# Altium PCB Czujnik światłowodowy PCB.PcbDoc
Units mm, origin at the board's own origin, x right, y up, seen from the top; angles counter-clockwise.
Board outline 80.26 x 52.25 mm, 2 copper layers (Top Layer, Bottom Layer); 30 components, 20 nets, 86 pads, 275 vias.
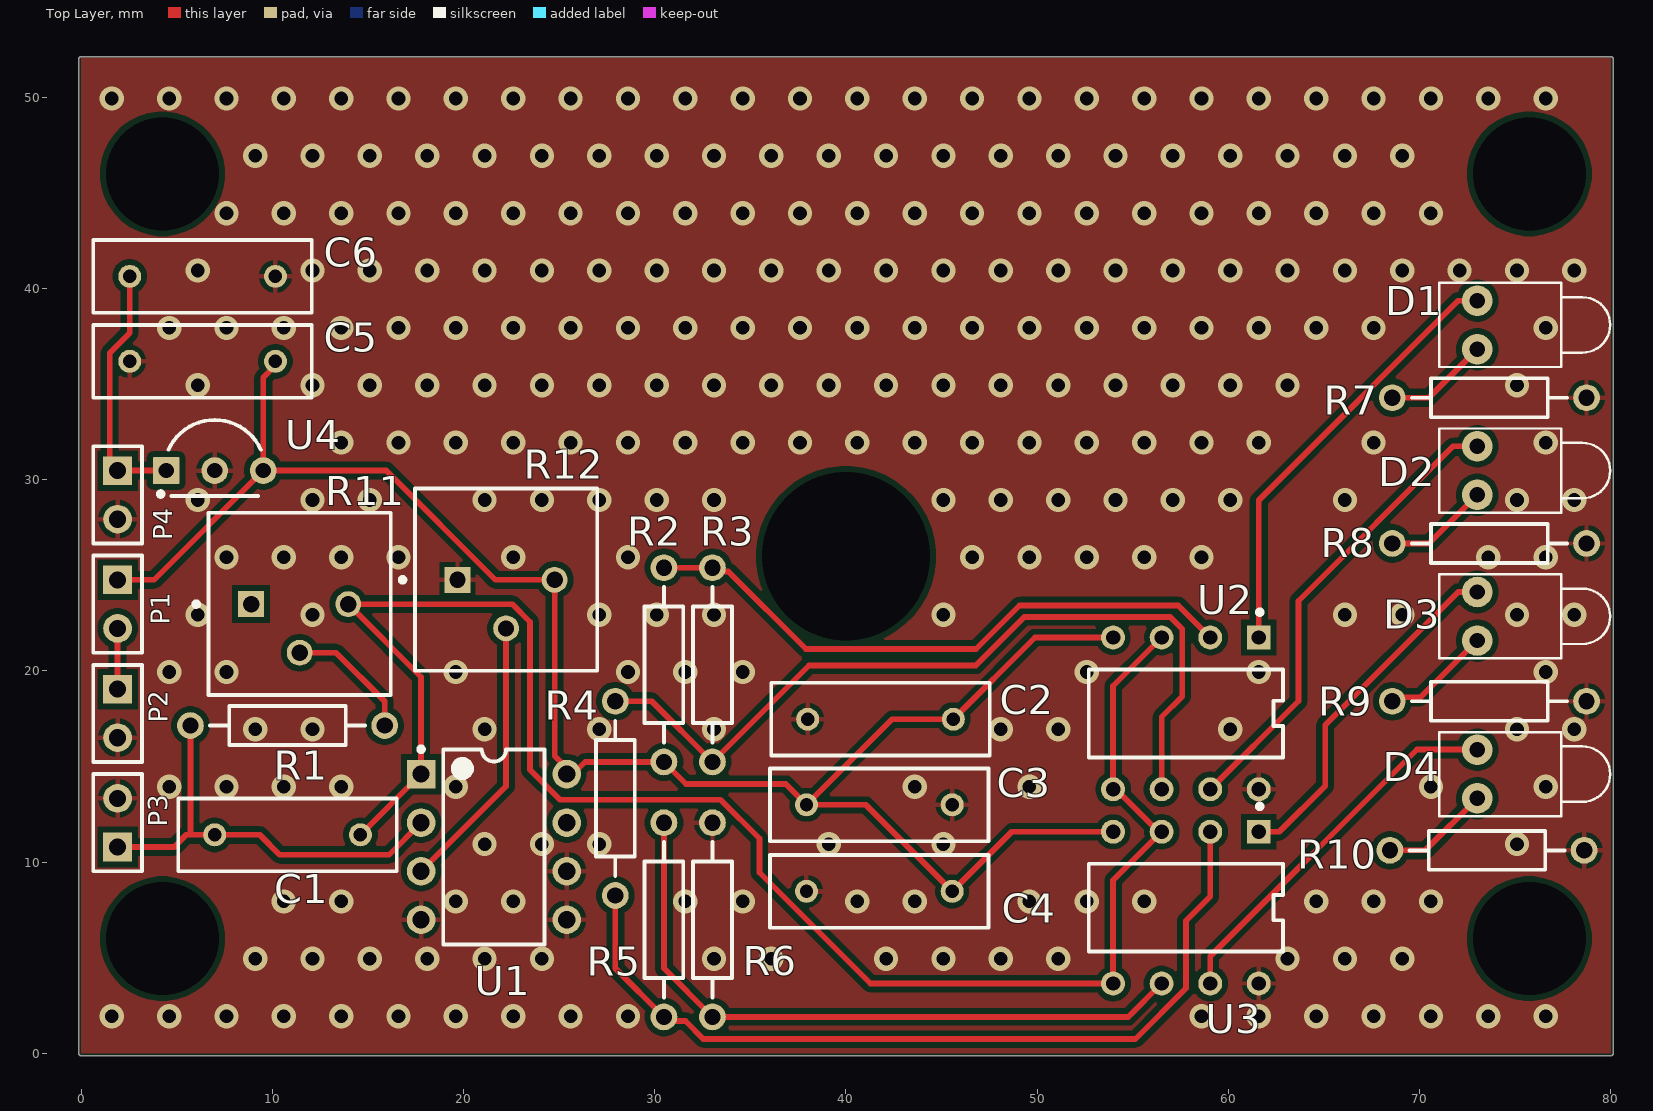
[diagram p0: Top Layer view]
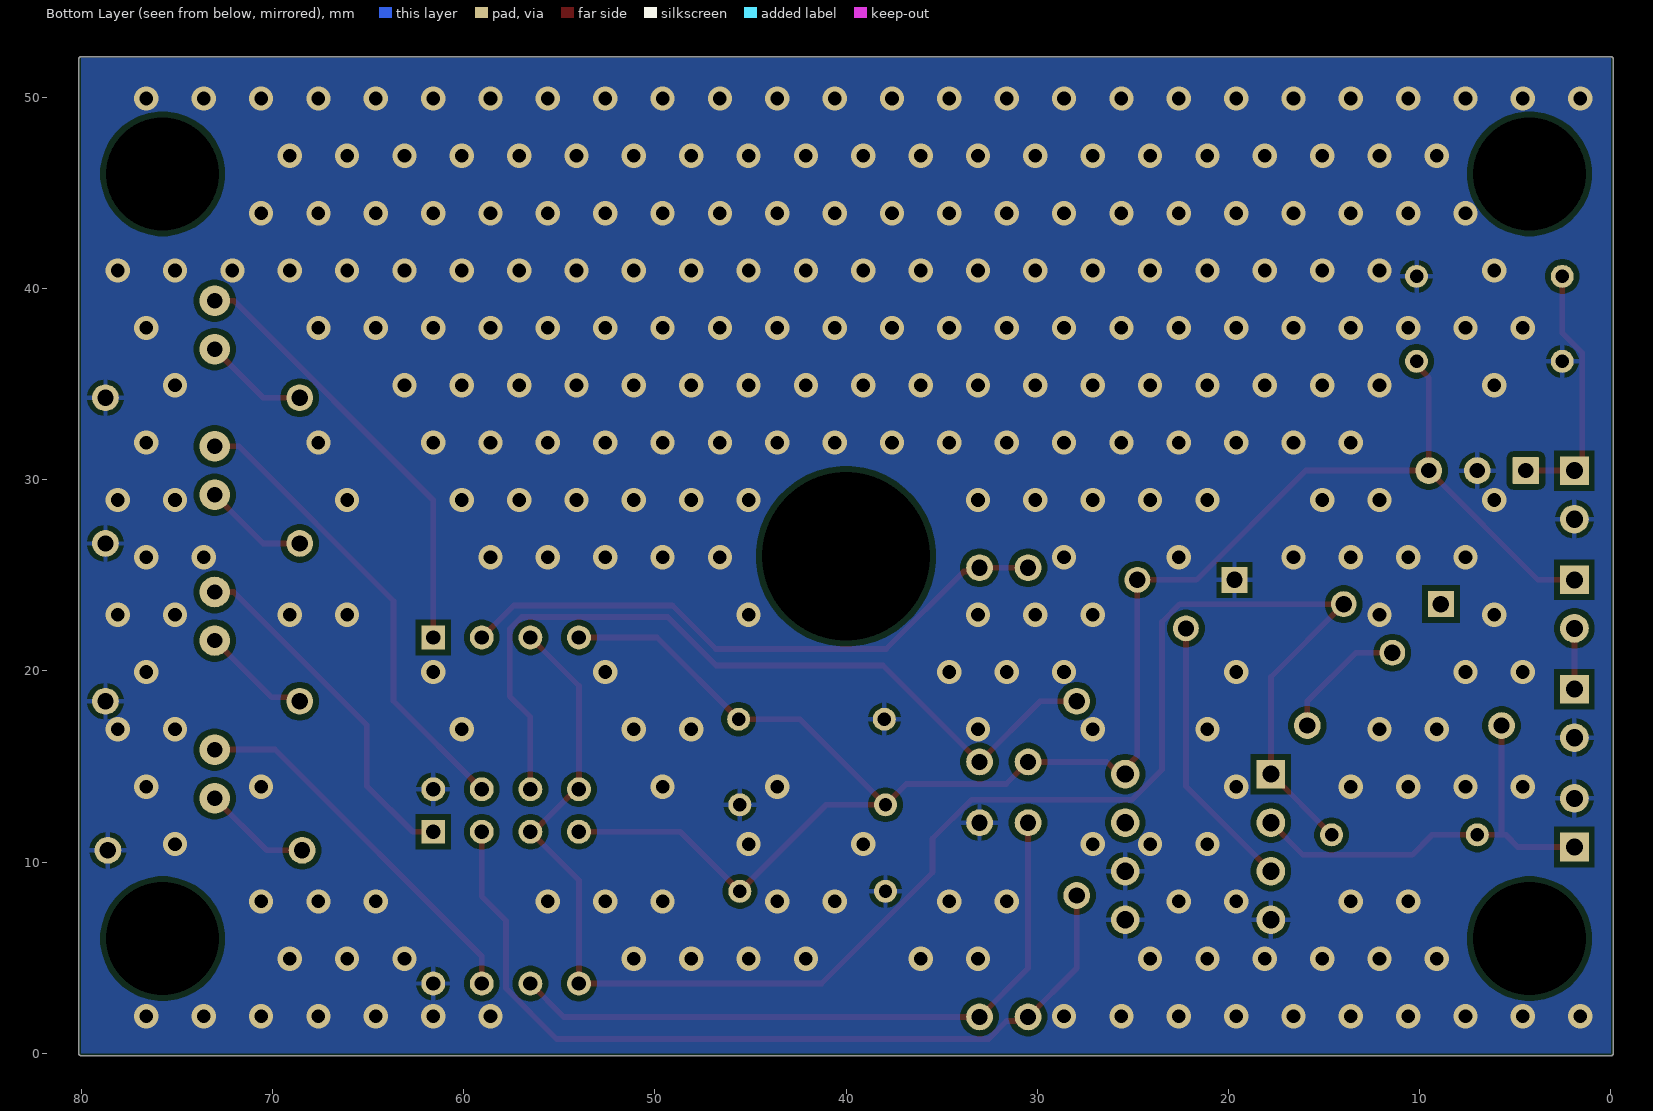
[diagram p1: Bottom Layer view, seen from below]

## Layer stack, top to bottom
Top Solder: solder mask 0.0102, Solder Resist, Dk 3.5
Top Layer: signal copper 0.0356
Dielectric 1: dielectric 0.32, FR-4, Dk 4.8
Bottom Layer: signal copper 0.0356
Bottom Solder: solder mask 0.0102, Solder Resist, Dk 3.5

## Board outline
0,-0.127 cw(c0,0) -0.127,0 -0.127,52 cw(c0,52) 0,52.127 80.01,52.127 cw(c80.01,52) 80.137,52 80.137,0 cw(c80.01,0) 80.005,-0.127

## Design rules (kind name [scope] priority, off if disabled: settings)
Clearance "Stitching GND" [IsStitchingVia and InNet('GND') vs (IsVia and (Not IsStitchingVia)) Or IsPad] p1: gap=0.127 ignorepadtopadclearanceinfootprint=FALSE
Clearance [All] p2: gap=0.3 ignorepadtopadclearanceinfootprint=FALSE except(0: Arc-Hole Track-Hole SMDPad-Hole THPad-Hole Via-Hole Fill-Hole Poly-Hole Region-Hole Text-Hole)
PolygonConnect [All] p1: connectstyle=Relief reliefconductorwidth=0.254 reliefentries=4 polygonreliefangle="90 Angle" airgapwidth=0.254
RoutingVias [All] p1: holewidth=0.711 width=1.27 viastyle="Through Hole" minholewidth=0.711 minwidth=1.27 maxholewidth=0.711 maxwidth=1.27
SolderMaskExpansion [All] p1: expansion=0.102 istentingtop=FALSE
Width [All] p1: maxlimit=0.3 minlimit=0.254 preferedwidth=0.3 minimp=50.000000 maximp=50.000000 favimp=50.000000
30 further rules are at their usual default settings.

## Classes and differential pairs
component class 105_Bańkowski: C1 C2 C3 C5 C6 D1 D2 D3 D4 P1 P2 P3 q R1 R2 R3 R4 R5 R6 R7 R8 R9 R10 R11 R12 U1 U3 U4

## Components (designator, comment, footprint, x,y, rotation, side; value= is the part's Value field where it differs from the comment)
C1 "Cap" RAD-0.3 10.795,11.43 r0 top value=100pF
C2 "Cap" RAD-0.3 41.81,17.475 r180 top value=100nF
C3 "Cap" RAD-0.3 41.75,13 r0 top value=100nF
C4 "Cap" RAD-0.3 41.75,8.475 r180 top value=100nF
C5 "Cap" RAD-0.3 6.35,36.195 r180 top value=470nF
C6 "Cap" RAD-0.3 6.35,40.64 r0 top value=100nF
D1 "LED_RED" LED-1 73.025,38.1 r0 top
D2 "LED_RED" LED-1 73.025,30.48 r0 top
D3 "LED_RED" LED-1 73.025,22.86 r0 top
D4 "LED_RED" LED-1 73.025,14.605 r0 top
P1 "BATTERY" HDR1X2 1.905,24.765 r270 top
P2 "SWITCH" HDR1X2 1.905,19.05 r270 top
P3 "D_SENSOR" HDR1X2 1.905,10.795 r90 top
P4 "D_LASER" HDR1X2 1.905,30.48 r270 top
R1 "Res2" AXIAL-0.4 10.795,17.145 r0 top value=1K
R2 "Res2" AXIAL-0.4 30.48,20.32 r270 top value=10K
R3 "Res2" AXIAL-0.4 33.02,20.32 r90 top value=10K
R4 "Res2" AXIAL-0.4 27.94,13.335 r90 top value=10K
R5 "Res2" AXIAL-0.4 30.48,6.985 r270 top value=10K
R6 "Res2" AXIAL-0.4 33.02,6.985 r270 top value=10K
R7 "Res2" AXIAL-0.4 73.66,34.29 r0 top value=470R
R8 "Res2" AXIAL-0.4 73.66,26.67 r0 top value=470R
R9 "Res2" AXIAL-0.4 73.66,18.415 r0 top value=470R
R10 "Res2" AXIAL-0.4 73.533,10.617 r0 top value=470R
R11 "100K" BOUR-3386P 11.43,22.225 r0 top
R12 "10K" BOUR-3386P 22.225,23.495 r0 top
U1 "TL032IP" P0008A 21.59,10.795 r0 top
U2 "LM393AP" FP-P0008A-MFG 57.785,17.78 r270 top
U3 "LM393AP" FP-P0008A-MFG 57.785,7.62 r270 top
U4 "LM78L05ACZ/NOPB" LP0003A 6.985,30.48 r90 top

## Footprints (in the part's own frame and the unit in brackets; to place one, negate y for a bottom-side part, rotate by r counter-clockwise, add the part's x,y. Pads: shape width x height; smd on the part's side, far side on the other; paste and mask are expansions set on the pad)
AXIAL-0.4 [mm] "Axial Device, Thru-Hole; 2 Leads; 0.4 in Pin Spacing"
  round 1.4 hole 0.85: 1(-5.08,0) 2(5.08,0)
  silkscreen extent -4.06,-1.02 4.06,1.02
BOUR-3386P [mm] "THD, 3-Leads, Body 9.53x9.53mm, Pitch 2.54mm"
  rect 1.35x1.35 hole 0.85: 1(-2.54,1.27)
  round 1.35 hole 0.85: 2(0,-1.27) 3(2.54,1.27)
  silkscreen extent -5.54,-3.48 4.76,6.05, body extent -4.79,-3.52 4.79,6.06, height 4.95
FP-P0008A-MFG [mm]
  rect 1.25x1.25 hole 0.75 paste-1000 mask+0: 1(-3.97,3.81)
  round 1.25 hole 0.75 paste-1000 mask+0: 2(-3.97,1.27) 3(-3.97,-1.27) 4(-3.97,-3.81) 5(3.97,-3.81) 6(3.97,-1.27) 7(3.97,1.27) 8(3.97,3.81)
  silkscreen extent -5.42,-5.08 2.3,5.08, body extent -4.69,-5.18 4.69,5.18, height 0.25
HDR1X2 [mm] "Connector; Header; 2 Position"
  rect 1.5x1.5 hole 0.9: 1(0,0)
  round 1.5 hole 0.9: 2(2.54,0)
  silkscreen extent -1.27,-1.27 3.81,1.27
LED-1 [mm] "LED; 2 Leads"
  round 1.6 hole 0.8: 1(0,1.27) 2(0,-1.27)
  silkscreen extent -2,-2.2 6.95,2.2
LP0003A [mm] "TO, Flat Index; 3 In-Line, Formed Axial Leads; Body Dia. 4.8mm; Leads 0.56 x 0.41 mm (max)"
  rrect7% 1.4x1.4 hole 0.8: 1(0,2.54)
  round 1.4 hole 0.8: 2(0,0) 3(0,-2.54)
  silkscreen extent -1.35,-2.41 2.65,2.95, body extent -1.33,-2.83 2.35,2.83, height 9.01
P0008A [mm] "DIP, 8-Leads, Body 10.15x6.6mm, Pitch 2.54mm"
  rect 1.5x1.5 hole 0.9: 1(-3.81,3.81)
  round 1.5 hole 0.9: 2(-3.81,1.27) 3(-3.81,-1.27) 4(-3.81,-3.81) 5(3.81,-3.81) 6(3.81,-1.27) 7(3.81,1.27) 8(3.81,3.81)
  silkscreen extent -3.93,-5.1 2.65,5.23, body extent -3.95,-5.07 3.95,5.07, height 5.08
RAD-0.3 [mm] "Radial Cap, Thru-Hole; 2 Leads; 0.3 in Pin Spacing"
  round 1.2 hole 0.7: 1(-3.81,0) 2(3.81,0)
  silkscreen extent -5.71,-1.91 5.71,1.91

## Part data
C1 C2 C3 C4 C5 C6: "Capacitor", LatestRevisionDate=17-Jul-2002, LatestRevisionNote="Re-released for DXP Platform.", PackageDescription="Radial Cap, Thru-Hole; 2 Leads; 0.3 in Pin Spacing", PackageReference=RAD-0.3, Published=8-Jun-2000, Publisher="Altium Limited"
D1 D2 D3 D4: library part LED1, "Typical RED GaAs LED", LatestRevisionDate=08-Jul-2005, LatestRevisionNote="Mech Layer 1 removed.", PackageDescription="LED; 2 Leads", PackageReference=LED-1, Published=8-Jun-2000, Publisher="Altium Limited"
P1 P2 P3 P4: library part "Header 2", "Header, 2-Pin", LatestRevisionDate=17-Jul-2002, LatestRevisionNote="Re-released for DXP Platform.", Publisher="Altium Limited"
R1 R2 R3 R4 R5 R6 R7 R8 R9 R10: "Resistor", LatestRevisionDate=17-Jul-2002, LatestRevisionNote="Re-released for DXP Platform.", PackageDescription="Axial Device, Thru-Hole; 2 Leads; 0.4 in Pin Spacing", PackageReference=AXIAL-0.4, Published=8-Jun-2000, Publisher="Altium Limited"
R11 R12: library part CMP-2000-05592-1, "Square Trimpot(R) Trimming Potentiometer, 100 KOhm, +/- 10%, 0.5 W, -55 to 125 degC, 3-Pin THD, RoHS, Tube", Manufacturer=Bourns, Manufacturer Series=3386, Maximum Operating Temperature=125C, Minimum Operating Temperature=-55C, Operating Temperature-Max (Cel)=125, Operating Temperature-Min (Cel)=-55, Package=RectangularPackage, Package Description="3-Pin Through Hole Device, Body 9.53 x 9.53 mm, Pitch 2.54 mm", Package Reference=3386P, Power Rating=1/2W, Rated Power Dissipation (P) (W)=0.5, Rated Temperature (Cel)=85, Resistance (ohm)=100000, Resistance Law=Linear, Resistance Value=100KOhm, Resistive Element Material=Cermet, Temperature Coefficient=100ppm/C, Tolerance=10%, Tolerance (%)=10, Actuator Orientation=Vertical, Actuator Type=Screw, Datasheet URL=http://www.bourns.com/docs/Product-Datasheets/3386.pdf, Datasheet Version=05/2016, Family=3386, Lead Free=NO, Manufacturer URL=http://www.bourns.com/, Mounting=ThroughHole, Mounting Feature=ThroughHole, Mounting Technology=ThroughHole, Number of Terminals=3, Number of Turns=1, Packaging=Tube, Product Depth=9.53mm, Product Height=4.83mm, Product Length=9.53mm, Product Type=Potentiometer, Shaft Diameter=3.15mm, Technology=Cermet, Terminal Finish=TINLEAD, Terminal Shape=WIRE, Termination Style=Pin, Type=Trimmer
U1: library part CMP-0017-01026-2, "Dual Enhanced JFET Low-Power Precision Operational Amplifier, 10 to 30 V, -40 to 85 degC, 8-pin DIP (P8), Pb-Free (RoHS)", Manufacturer="Texas Instruments", Rating=Military, Total Supply Voltage(Max)(+5V is 5, +/-5V is 10)=30, Total Supply Voltage(Min)(+5V is 5, +/-5V is 10)=10, CMRR(Min)(dB)=70, Code_JEDEC=MS-001, ComponentLink1Description="Manufacturer URL", ComponentLink1URL=http://www.ti.com/, ComponentLink2Description=Datasheet, ComponentLink2URL=http://www.ti.com/lit/ds/symlink/tl032.pdf, ComponentLink3Description="Package Specification", ComponentLink3URL=http://www.ti.com/litv/pdf/mpdi001b, DatasheetVersion=SLOS180C, Eco-Plan="Pb-Free (RoHS)", GBW(Typ)(MHz)=1.1, IIB(Max)(pA)=200, Iq per channel(Max)(mA)=0.28, Mounting Technology="Through Hole", Number of Channels=2, Offset Drift(Typ)(uV/C)=10.8, PackageDescription="8-Pin Plastic In-Line, Body 9.59 x 6.35 mm, Pitch 2.54 mm", PackageReference=P0008A, PackageVersion="4040082/E, 04/2010", PartNumber=TL032IP, Slew Rate(Typ)(V/us)=5.1, Sub Family="General Purpose Amplifier, High Supply Voltage Amplifier (>=30V), Low Power Amp (<=500uA)", Vio (25C)(Max)(mV)=1.5, Vn at 1kHz(Typ)(nV/rtHz)=41
U2 U3: library part CMP-04896-000062-1, "IC DUAL DIFF COMPARATOR 8-DIP", Case/Package=PDIP, Input Bias Current=250nA, Input Offset Voltage (Vos)=2mV, Max Dual Supply Voltage=18V, Max Operating Temperature=70°C, Max Supply Current=500uA, Max Supply Voltage=30V, Min Dual Supply Voltage=1V, Min Operating Temperature=0°C, Min Supply Voltage=2V, Nominal Supply Current=1mA, Output Current=20mA, Output Current per Channel=6mA, Package Quantity=50, Quiescent Current=2.5mA, Voltage Gain=106.02dB, Contact Plating=Gold, Lead Free="Lead Free", Max Input Current=250nA, Mount="Through Hole", Number of Channels=2, Number of Elements=2, Number of Pins=8, Output Type=TTL, Packaging=Rail/Tube, Radiation Hardening=No, REACH SVHC="No SVHC", Response Time=0.3us, RoHS Compliant=Yes, Type="General Purpose", Weight=0.015535oz
U4: library part CMP-0062-00040-4, "3-Terminal Positive Regulator, 5 Vout, 3-pin TO-92, Pb-Free", Manufacturer="Texas Instruments", PackageTopMarking=NSXYTT*LM78L*05ACZ, PowerWise=N, Code_JEDEC=TO-226-AA, ComponentLink1Description="Datasheet URL", ComponentLink1URL=http://www.ti.com/general/docs/lit/getliterature.tsp?genericPartNumber=LM78L05&fileType=pdf, CompType="LDO IC", High-Reliability=Y, PackageDescription="TO-92, Molded, 3 Lead", PackageReference=LP0003A, PartNumber=LM78L05ACZ/NOPB, PinCount=3, RoHS=Y

## Free pads (board coordinates)
  round 1.524 hole 8.8 unplated: 1(40,26)
  round 1.524 hole 5.9 unplated: 3(4.25,46) 4(4.25,6) 6(75.75,46)
  round 1.524 hole 5.9: 5(75.75,6)

## Via types
v1: diameter 1.27, hole 0.711, Top Layer to Bottom Layer, 275 vias

## Nets (pads, with @x,y where several pads share a name; then routed paths per layer and width w, separated by ;. In a path a pad name is that pad's centre, name@x,y a point inside that pad or via, vN(x,y) a via of type N, cw(c..) or ccw(c..) an arc to the next point about the centre after c; other vN are vias at no path point)
GND: C2.2 C3.2 C4.2 C5.2 C6.2 P2.2 P3.2 P4.2 R6.1 R7.2 R8.2 R9.2 R10.2 R12.1 U1.4 U1.5 U1.6 U2.8 U3.8 U4.2
  other v1: 1.6,1.944 4.6,1.944 7.6,1.944 10.6,1.944 13.6,1.944 16.6,1.944 19.6,1.944 22.6,1.944 25.6,1.944 28.6,1.944 58.6,1.944 61.6,1.944 64.6,1.944 67.6,1.944 70.6,1.944 73.6,1.944 76.6,1.944 9.1,4.944 12.1,4.944 15.1,4.944 18.1,4.944 21.1,4.944 24.1,4.944 33.1,4.944 36.1,4.944 42.1,4.944 45.1,4.944 48.1,4.944 51.1,4.944 63.1,4.944 66.1,4.944 69.1,4.944 10.6,7.944 13.6,7.944 19.6,7.944 22.6,7.944 31.6,7.944 34.6,7.944 40.6,7.944 43.6,7.944 49.6,7.944 52.6,7.944 55.6,7.944 64.6,7.944 67.6,7.944 70.6,7.944 21.1,10.944 24.1,10.944 27.1,10.944 39.1,10.944 45.1,10.944 75.1,10.944 4.6,13.944 7.6,13.944 10.6,13.944 13.6,13.944 19.6,13.944 43.6,13.944 49.6,13.944 70.6,13.944 76.6,13.944 9.1,16.944 12.1,16.944 21.1,16.944 27.1,16.944 33.1,16.944 48.1,16.944 51.1,16.944 60.1,16.944 75.1,16.944 78.1,16.944 4.6,19.944 7.6,19.944 19.6,19.944 28.6,19.944 31.6,19.944 34.6,19.944 52.6,19.944 61.6,19.944 76.6,19.944 6.1,22.944 12.1,22.944 27.1,22.944 30.1,22.944 33.1,22.944 45.1,22.944 66.1,22.944 69.1,22.944 75.1,22.944 78.1,22.944 7.6,25.944 10.6,25.944 13.6,25.944 16.6,25.944 22.6,25.944 28.6,25.944 46.6,25.944 49.6,25.944 52.6,25.944 55.6,25.944 58.6,25.944 73.6,25.944 76.6,25.944 6.1,28.944 12.1,28.944 15.1,28.944 21.1,28.944 24.1,28.944 27.1,28.944 30.1,28.944 33.1,28.944 45.1,28.944 48.1,28.944 51.1,28.944 54.1,28.944 57.1,28.944 60.1,28.944 66.1,28.944 75.1,28.944 78.1,28.944 13.6,31.944 16.6,31.944 19.6,31.944 22.6,31.944 25.6,31.944 28.6,31.944 31.6,31.944 34.6,31.944 37.6,31.944 40.6,31.944 43.6,31.944 46.6,31.944 49.6,31.944 52.6,31.944 55.6,31.944 58.6,31.944 61.6,31.944 67.6,31.944 76.6,31.944 6.1,34.944 12.1,34.944 15.1,34.944 18.1,34.944 21.1,34.944 24.1,34.944 27.1,34.944 30.1,34.944 33.1,34.944 36.1,34.944 39.1,34.944 42.1,34.944 45.1,34.944 48.1,34.944 51.1,34.944 54.1,34.944 57.1,34.944 60.1,34.944 63.1,34.944 75.1,34.944 4.6,37.944 7.6,37.944 10.6,37.944 13.6,37.944 16.6,37.944 19.6,37.944 22.6,37.944 25.6,37.944 28.6,37.944 31.6,37.944 34.6,37.944 37.6,37.944 40.6,37.944 43.6,37.944 46.6,37.944 49.6,37.944 52.6,37.944 55.6,37.944 58.6,37.944 61.6,37.944 64.6,37.944 67.6,37.944 76.6,37.944 6.1,40.944 12.1,40.944 15.1,40.944 18.1,40.944 21.1,40.944 24.1,40.944 27.1,40.944 30.1,40.944 33.1,40.944 36.1,40.944 39.1,40.944 42.1,40.944 45.1,40.944 48.1,40.944 51.1,40.944 54.1,40.944 57.1,40.944 60.1,40.944 63.1,40.944 66.1,40.944 69.1,40.944 72.1,40.944 75.1,40.944 78.1,40.944 7.6,43.944 10.6,43.944 13.6,43.944 16.6,43.944 19.6,43.944 22.6,43.944 25.6,43.944 28.6,43.944 31.6,43.944 34.6,43.944 37.6,43.944 40.6,43.944 43.6,43.944 46.6,43.944 49.6,43.944 52.6,43.944 55.6,43.944 58.6,43.944 61.6,43.944 64.6,43.944 67.6,43.944 70.6,43.944 9.1,46.944 12.1,46.944 15.1,46.944 18.1,46.944 21.1,46.944 24.1,46.944 27.1,46.944 30.1,46.944 33.1,46.944 36.1,46.944 39.1,46.944 42.1,46.944 45.1,46.944 48.1,46.944 51.1,46.944 54.1,46.944 57.1,46.944 60.1,46.944 63.1,46.944 66.1,46.944 69.1,46.944 1.6,49.944 4.6,49.944 7.6,49.944 10.6,49.944 13.6,49.944 16.6,49.944 19.6,49.944 22.6,49.944 25.6,49.944 28.6,49.944 31.6,49.944 34.6,49.944 37.6,49.944 40.6,49.944 43.6,49.944 46.6,49.944 49.6,49.944 52.6,49.944 55.6,49.944 58.6,49.944 61.6,49.944 64.6,49.944 67.6,49.944 70.6,49.944 73.6,49.944 76.6,49.944
NetC1_1: C1.1 P3.1 R1.1 U1.2 | length 23
  Top Layer w0.3: P3.1 4.865,10.795 5.5,11.43 5.715,11.43 ; R1.1 5.715,11.43 ; U1.2 16.095,10.38 10.389,10.38 9.339,11.43 5.715,11.43
NetC1_2: C1.2 R11.3 U1.1 U2.3 U2.5 U3.3 U3.5 | length 90.2
  Top Layer w0.3: C1.2 U1.1 17.78,19.685 R11.3 22.546,23.495 23.479,22.562 23.479,14.828 25.043,13.265 33.446,13.265 35.476,11.236 35.476,9.454 41.28,3.65 U3.5 53.975,9.05 U3.3 56.355,11.59 54.135,13.81 U2.5 53.975,19.21 U2.3
NetC6_1: C6.1 P4.1 U4.1 | length 13.3
  Top Layer w0.3: C6.1 2.54,37.68 1.49,36.63 1.49,30.895 P4.1 U4.1
NetD1_1: D1.1 U2.1 | length 22.9
  Top Layer w0.3: U2.1 61.595,28.931 72.034,39.37 D1.1
NetD1_2: D1.2 R7.1 | length 5.5
  Top Layer w0.3: R7.1 70.485,34.29 D1.2
NetD2_1: D2.1 U2.7 | length 24.5
  Top Layer w0.3: U2.7 63.67,18.425 63.67,23.665 71.755,31.75 D2.1
NetD2_2: D2.2 R8.1 | length 5.5
  Top Layer w0.3: R8.1 70.485,26.67 D2.2
NetD3_1: D3.1 U3.1 | length 18.5
  Top Layer w0.3: U3.1 62.67,11.59 65.069,13.989 65.069,17.166 72.034,24.13 D3.1
NetD3_2: D3.2 R9.1 | length 5.8
  Top Layer w0.3: R9.1 68.79,18.625 70.06,18.625 D3.2
NetD4_1: D4.1 U3.7 | length 19.9
  Top Layer w0.3: U3.7 59.055,5.08 69.87,15.895 73.005,15.895 D4.1
NetD4_2: D4.2 R10.1 | length 5.7
  Top Layer w0.3: R10.1 70.307,10.617 D4.2
NetP1_2: P1.2 P2.1 | length 3.2
  Top Layer w0.3: P2.1 P1.2
NetR1_2: R1.2 R11.2 | length 6.8
  Top Layer w0.3: R11.2 13.335,20.955 15.875,18.415 R1.2
NetR2_1: R2.1 R3.2 U2.2 | length 32
  Top Layer w0.3: R2.1 R3.2 33.216,25.204 33.851,25.204 37.905,21.15 46.808,21.15 49.083,23.425 57.38,23.425 U2.2
NetR3_1: R3.1 R4.2 U2.6 | length 43.2
  Top Layer w0.3: R4.2 29.845,18.415 R3.1 38.065,20.285 46.791,20.285 49.331,22.825 56.96,22.825 57.59,22.195 57.59,18.669 56.515,17.594 U2.6
NetR4_1: R4.1 R5.2 U3.2 | length 45
  Top Layer w0.3: R4.1 27.94,4.445 R5.2 30.69,1.695 31.604,1.695 32.544,0.755 55.14,0.755 57.785,3.4 57.785,6.936 59.055,8.206 U3.2
NetR5_1: R5.1 R6.2 U3.6 | length 35.4
  Top Layer w0.3: R5.1 30.48,4.445 R6.2 54.77,1.905 U3.6
NetR12_2: R12.2 U1.3 | length 14.5
  Top Layer w0.3: U1.3 22.225,13.97 R12.2
VCC: C2.1 C3.1 C4.1 C5.1 P1.1 R2.2 R12.3 U1.8 U2.4 U3.4 U4.3 | length 96.8
  Top Layer w0.3: P1.1 3.81,24.765 U4.3 ; C5.1 10.16,35.98 9.525,35.345 U4.3 ; R2.2@30.48,15.205 30.515,15.205 31.63,14.09 36.85,14.09 C3.1 ; R2.2 26.36,15.24 25.725,14.605 U1.8 25.4,14.93 24.765,15.565 R12.3 21.671,24.765 15.956,30.48 U4.3 ; U2.4@53.842,21.883 U2.4 49.895,21.75 C2.1 42.415,17.475 C3.1 ; U3.4 48.675,11.59 C4.1 41.035,13 C3.1
pads on no net: R11.1 U1.7

## Polygon pours and split planes (outlines as drawn)
GND on Top Layer "GND_L01_P000" (solid, pour order 0): 0,52.07 80.01,52.07 80.01,0 0,0
GND on Bottom Layer "GND_L02_P001" (solid, pour order 1): 0,52.07 80.01,52.07 80.01,0 0,0